# EAGLE board Light_Engine_PCB (EAGLE 9.7.0)
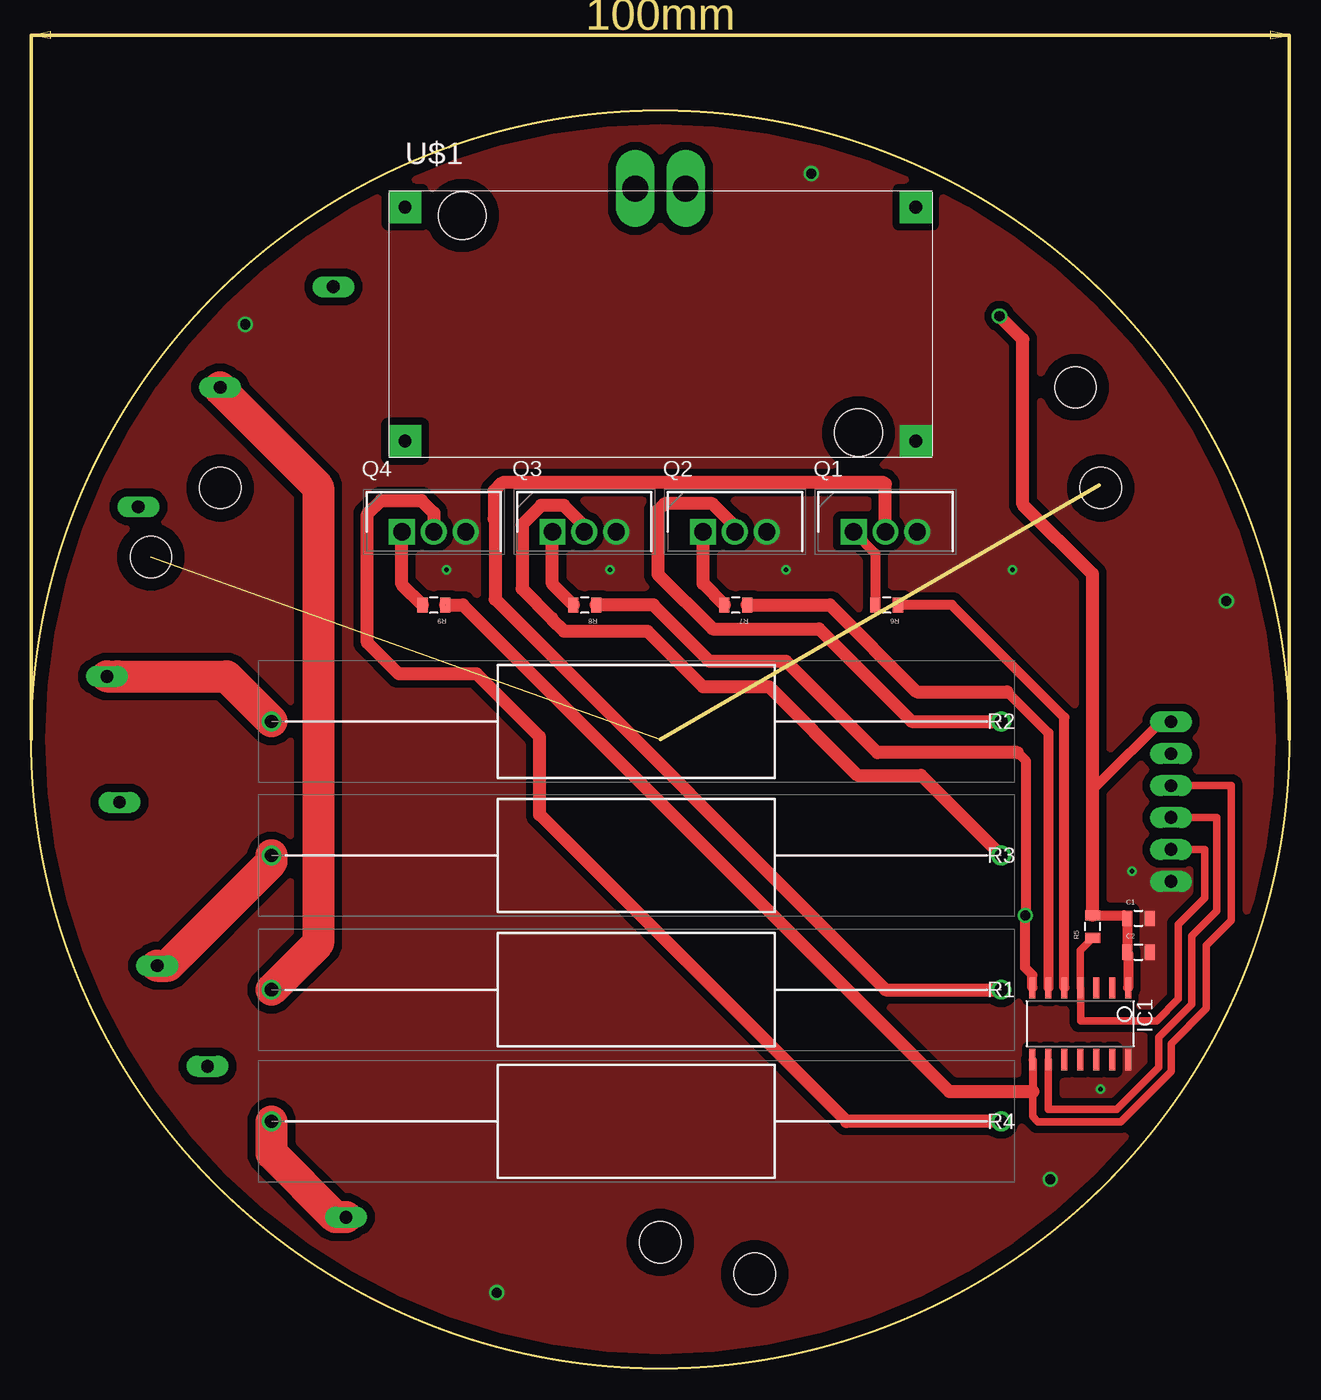
[diagram p0: board, top side]
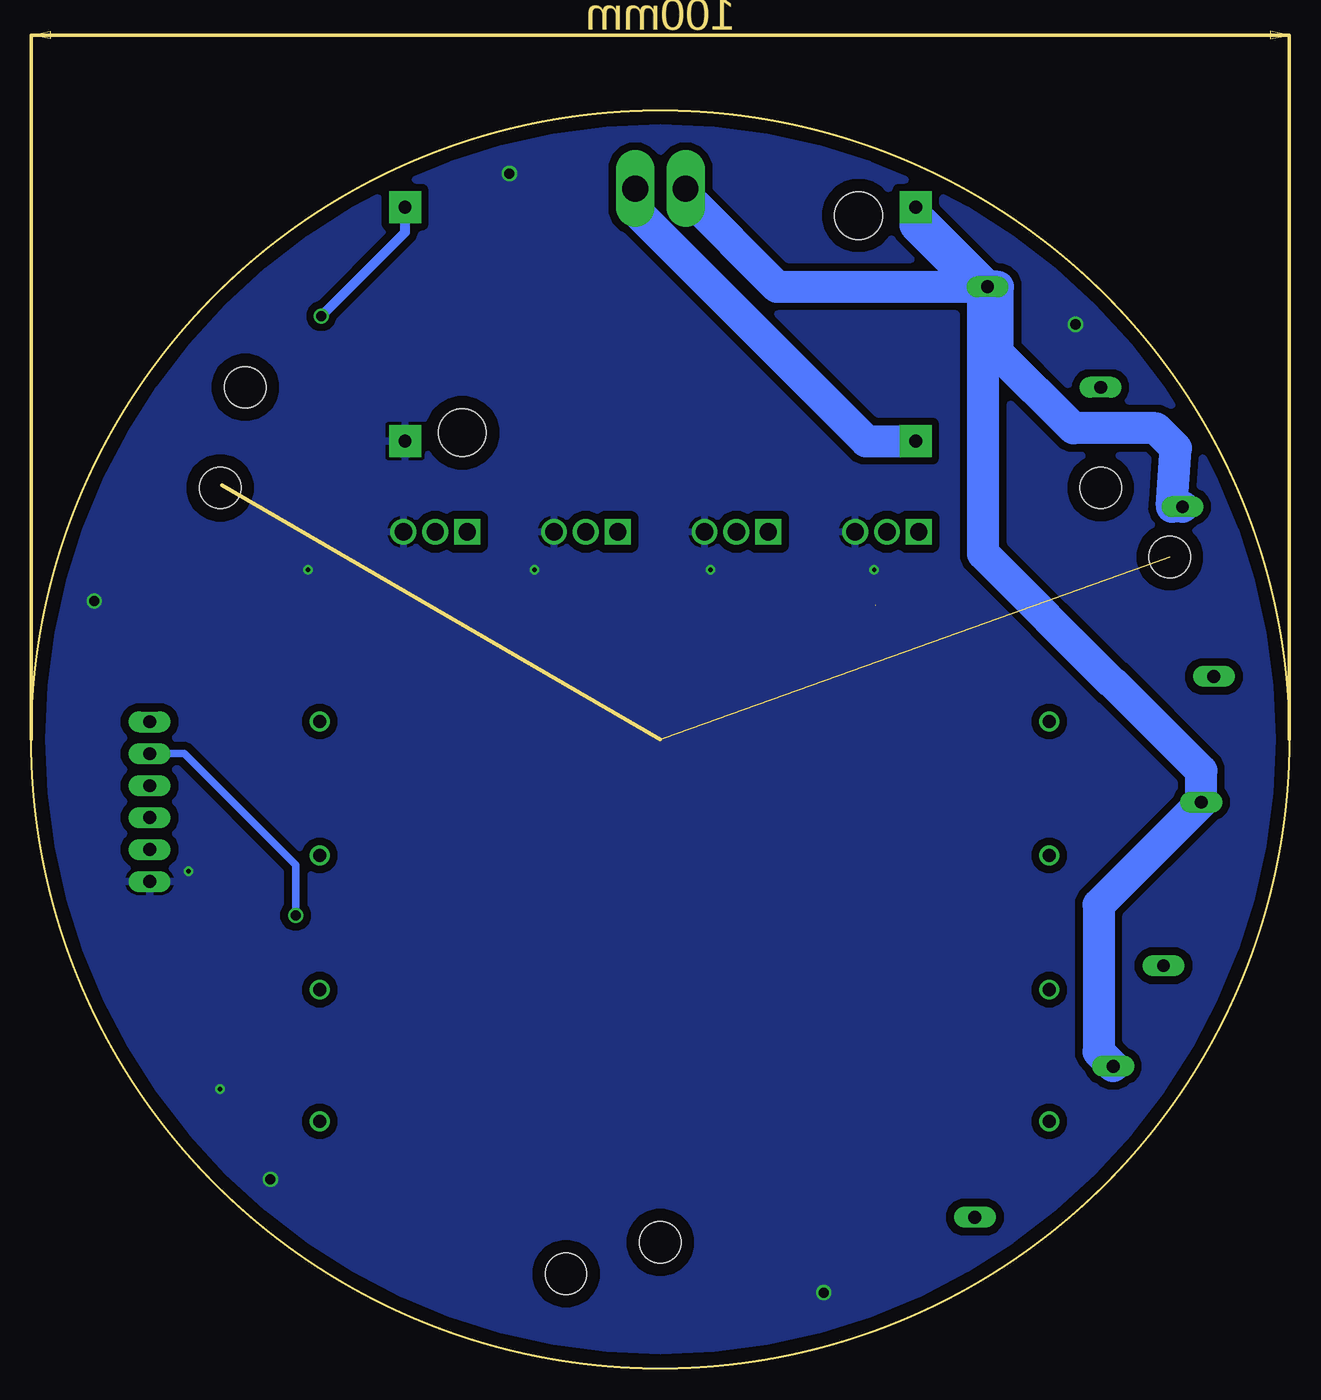
[diagram p1: board, bottom side, seen from below]

Size 100 x 100 mm. Coordinates in mm from the lower left corner, seen from the top.
Outline: circle at 50,50 radius 50
Copper layers (1*16): Top / Bottom
Stack-up Default Layer Stack: Top User Defined 0.035mm / Dielectric-1 User Defined 1.5mm / Bottom User Defined 0.035mm
Design rules "default": minimum track width 6mil, minimum drill 0.35mm, track to track 6mil, track to pad 6mil, pad to pad 6mil, via to via 6mil, smd to smd 6mil, copper to edge 40mil, drill to drill 6mil, minimum pad ring 10mil, minimum via ring 8mil, stop-mask expansion 4mil, vias tented up to drill 0mil, thermal gap 10mil
Holes 3.3 mm at 15,70 85,70 50,10 83,78 57.5,7.5 9.5,64.5

## Footprints (pad centres in the part's own frame; a part is rotated, then mirrored left to right if it is on the bottom)
HEADER-2-DIP-12AWG = drill 2.052 pad 2.184 long: 1 0,-2; 2 0,2
0805 = smd 1.2 x 0.8: 1 0,-0.9; 2 0,0.9
SOIC14 = smd 0.45 x 1.708: 1 -3.81,-2.854; 2 -2.54,-2.854; 3 -1.27,-2.854; 4 0,-2.854; 5 1.27,-2.854; 6 2.54,-2.854; 7 3.81,-2.854; 8 3.81,2.854; 9 2.54,2.854; 10 1.27,2.854; 11 0,2.854; 12 -1.27,2.854; 13 -2.54,2.854; 14 -3.81,2.854
HEADER-1-DIP = drill 1.016 pad 1.676 long: 1 0,0
TO254P470X1016X2019-3P = drill 1.37 pad 2.055 square: 1 0,0 | drill 1.37 pad 2.055: 2 2.535,0; 3 5.07,0
RESAD5800W85L2200D900 = drill 1.05 pad 1.575: 1 0,0; 2 58,0
DC-DC-CONVERTER-LM2596 = drill 1.016 pad 2.54 square: 1 -20.3,9.3; 2 -20.3,-9.3; 3 20.3,9.3; 4 20.3,-9.3 | hole 3.81: -15.748,8.636; 15.748,-8.636
HEADER-6-DIP = drill 1.016 pad 1.676 long: 1 0,0; 2 0,2.54; 3 0,5.08; 4 0,7.62; 5 0,10.16; 6 0,12.7

## Placement (x,y rotation side)
12V  HEADER-2-DIP  [HEADER-2-DIP-12AWG]  50,93.8 90 top
C1  0.1uF  [0805]  88.01,35.77 270 top
C2  10uF  [0805]  88.01,33.08 270 top
IC1  MICRO_ATTINY84-SSU  [SOIC14]  83.38,27.38 180 top
LED1+  HEADER-1-DIP  [HEADER-1-DIP]  24,86 0 top
LED1-  HEADER-1-DIP  [HEADER-1-DIP]  15,78 0 top
LED2+  HEADER-1-DIP  [HEADER-1-DIP]  8.5,68.5 0 top
LED2-  HEADER-1-DIP  [HEADER-1-DIP]  6,55 0 top
LED3+  HEADER-1-DIP  [HEADER-1-DIP]  7,45 0 top
LED3-  HEADER-1-DIP  [HEADER-1-DIP]  10,32 0 top
LED4+  HEADER-1-DIP  [HEADER-1-DIP]  14,24 0 top
LED4-  HEADER-1-DIP  [HEADER-1-DIP]  25,12 0 top
Q1  FQP30N06L  [TO254P470X1016X2019-3P]  65.36,66.51 0 top
Q2  FQP30N06L  [TO254P470X1016X2019-3P]  53.39,66.51 0 top
Q3  FQP30N06L  [TO254P470X1016X2019-3P]  41.42,66.51 0 top
Q4  FQP30N06L  [TO254P470X1016X2019-3P]  29.45,66.51 0 top
R1  5W/20R  [RESAD5800W85L2200D900]  77.09,30.09 180 top
R2  5W/20R  [RESAD5800W85L2200D900]  77.09,51.43 180 top
R3  5W/20R  [RESAD5800W85L2200D900]  77.09,40.77 180 top
R4  5W/20R  [RESAD5800W85L2200D900]  77.09,19.61 180 top
R5  10k  [0805]  84.36,35.11 0 top
R6  220  [0805]  67.99,60.69 90 top
R7  220  [0805]  55.99,60.69 90 top
R8  220  [0805]  43.99,60.69 90 top
R9  220  [0805]  31.99,60.69 90 top
U$1  STEP-DOWN-DC-DC-CONVERTER  [DC-DC-CONVERTER-LM2596]  50,83.02 0 top
U$2  HEADER-6-DIP  [HEADER-6-DIP]  90.6,51.4 180 top

## Library data of the parts
12V U$1 = myLibrary
C1 C2 IC1 LED1+ LED1- LED2+ LED2- LED3+ LED3- LED4+ LED4- R5-R9 U$2 = homemade-hardware
Q1-Q4 = myLibrary; DESCRIPTION: FQP30N06L N-Channel MOSFET, 32 A, 60 V QFET, 3-Pin TO-220 ON Semiconductor; HEIGHT: 4.7mm; MANUFACTURER_NAME: onsemi; MANUFACTURER_PART_NUMBER: FQP30N06L; MOUSER_PART_NUMBER: 512-FQP30N06L; MOUSER_PRICE-STOCK: https://www.mouser.co.uk/ProductDetail/ON-Semiconductor-Fairchild/FQP30N06L?qs=%252Beu4QTTVkDqugBwFplJ%252Bug%3D%3D
R1-R4 = myLibrary; DESCRIPTION: Wirewound Resistors - Through Hole 5W 10 Ohm 5%; HEIGHT: mm; MANUFACTURER_NAME: KEMET; MANUFACTURER_PART_NUMBER: SQP500JB-10R; MOUSER_PART_NUMBER: 603-SQP500JB-10R; MOUSER_PRICE-STOCK: https://www.mouser.com/Search/Refine.aspx?Keyword=603-SQP500JB-10R

## Nets
3.3V_FROM_POWER: C1.1 C2.1 IC1.1 R5.2 U$1.3 U$2.1
12V+: 12V.2 LED1+.1 LED2+.1 LED3+.1 LED4+.1 U$1.1
12V-: 12V.1 U$1.2
GND: C1.2 C2.2 IC1.14 Q1.3 Q2.3 Q3.3 Q4.3 U$1.4 U$2.6
LED1: IC1.5 R6.1
LED2: IC1.6 R7.1
N$1: LED1-.1 R1.2
N$2: LED2-.1 R2.2
N$3: LED3-.1 R3.2
N$4: LED4-.1 R4.2
N$5: Q1.2 R1.1
N$6: Q2.2 R2.1
N$7: Q3.2 R3.1
N$8: Q4.2 R4.1
N$9: Q2.1 R7.2
N$10: Q3.1 R8.2
N$11: Q4.1 R9.2
N$12: Q1.1 R6.2
RESET: IC1.4 R5.1 U$2.5
SPI_MISO/LED4: IC1.8 R9.1 U$2.3
SPI_MOSI/LED3: IC1.7 R8.1 U$2.2
SPI_SCK: IC1.9 U$2.4

## Tracks (layer width: path | path; a pad name or v marks a point on that pad's centre or on a via)
3.3V_FROM_POWER  (via drill 0.8)
  Top 0.813: U$2.1 89.76,51.4 84.96,46.6 84.36,46 R5.2 86.87,36.01 C1.1 C2.1 87.19,33 IC1.1
  Top 1.016: R5.2 84.36,63.15 78.83,68.69 78.83,81.79 v76.96,83.66
  Bottom 0.813: v76.96,83.66 70.3,90.32 U$1.3
12V+
  Bottom 2.54: 12V.2 48,93.27 40.73,86 24.84,86 | LED4+.1 15.16,25.16 15.16,36.84 LED3+.1 7,47.5 14,54.5 14.07,54.5 24.34,64.77 24.34,86 | LED1+.1 24.34,86 | 24.34,86 24.84,86 | 24.84,86 29.7,90.86 U$1.1 29.7,91.7 LED1+.1 | LED2+.1 9.34,68.5 9.02,73.16 10.61,74.74 17.18,74.74 23.16,80.72 23.16,86 LED1+.1
12V-
  Bottom 2.54: 12V.1 52,92.27 52,92.09 33.64,73.72 U$1.2
GND  (via drill 0.35, 0.8)
  other vias: 17,83 37,6 81,15 95,61 62,95 87.5,39.5 85,22.2 78,63.5 60,63.5 46,63.5 33,63.5
  pour Top (isolate 0.61, no thermals): 105.3,105.3 -5.3,105.3 -5.3,-5.3 105.3,-5.3
  pour Bottom (isolate 0.61): 105.3,105.3 -5.3,105.3 -5.3,-5.3 105.3,-5.3
LED1
  Top 0.813: IC1.5 82.11,51.75 73.17,60.69 R6.1
LED2
  Top 0.813: 77.58,53.77 80.84,50.51 IC1.6
  Top 1.016: R7.1 63.49,60.69 70.4,53.77 77.58,53.77
N$1
  Top 2.54: LED1-.1 15,77.84 22.78,70.06 22.78,33.78 R1.2
N$2
  Top 2.54: LED2-.1 6.84,55 15.52,55 R2.2
N$3
  Top 2.54: LED3-.1 10.84,32 19.09,40.25 R3.2
N$4
  Top 2.54: LED4-.1 24.16,12 19.09,17.07 R4.2
N$5
  Top 1.016: R1.1 67.91,30.09 36.86,61.14 36.86,67.48 36.78,67.55 36.78,69.75 37.45,70.42 67.78,70.42 67.89,70.31 Q1.2
N$6
  Top 1.016: R2.1 69.98,51.43 62.63,58.78 54.15,58.78 49.8,63.12 49.8,68.2 50.35,68.75 54.14,68.75 55.92,66.96 Q2.2
N$7
  Top 1.016: R3.1 70.73,47.13 65.7,47.13 58.66,54.18 53.37,54.18 48.96,58.6 42.33,58.6 41.38,59.54 41.38,59.61 39,61.99 39,67.08 40.52,68.6 42.32,68.6 43.95,66.96 Q3.2
N$8
  Top 1.016: Q4.2 31.98,68.02 31,69 27.8,69 26.71,67.91 26.71,57.7 29.21,55.21 35.39,55.21 40.4,50.2 40.4,44.01 64.8,19.61 R4.1
N$9
  Top 1.016: R7.2 53.39,62.38 Q2.1
N$10
  Top 1.016: R8.2 41.42,62.36 Q3.1
N$11
  Top 1.016: R9.2 29.45,62.33 Q4.1
N$12
  Top 0.813: Q1.1 67.09,64.78 R6.2
RESET
  Top 0.61: R5.1 83.36,33.21 83.36,30.25 IC1.4 83.4,30.21 83.4,27.6 89.44,27.6 91.19,29.35 91.19,35.3 93.28,37.38 93.28,41.24 U$2.5
SPI_MISO/LED4  (1 unrouted)
  Top 0.61: 79.63,22 79.63,24.46 IC1.8 79.6,24.5 79.6,20 80,19.6 86.6,19.6 90.6,23.6 90.6,25.8 93.4,28.6 93.4,33.6 95.4,35.6 95.4,46.32 U$2.3
  Top 1.016: 79.63,22 72.97,22 34.29,60.69 32.91,60.69
SPI_MOSI/LED3  (via drill 0.8)
  Top 0.813: IC1.7 79.57,31.26 79,31.83 v79,36 79.08,36.08 79.08,48.27 78.4,48.95
  Top 1.016: 78.4,48.95 67.26,48.95 60.01,56.2 53.92,56.2 49.44,60.69 R8.1
  Bottom 0.61: U$2.2 87.86,48.86 79,40 v79,36
SPI_SCK
  Top 0.61: IC1.9 80.84,20.56 86.28,20.56 89.64,23.92 89.64,26.32 92.24,28.92 92.24,34.35 94.24,36.35 94.24,43.78 U$2.4